# EAGLE board BusPirate-v3.5d-SSOP (EAGLE 5.07)
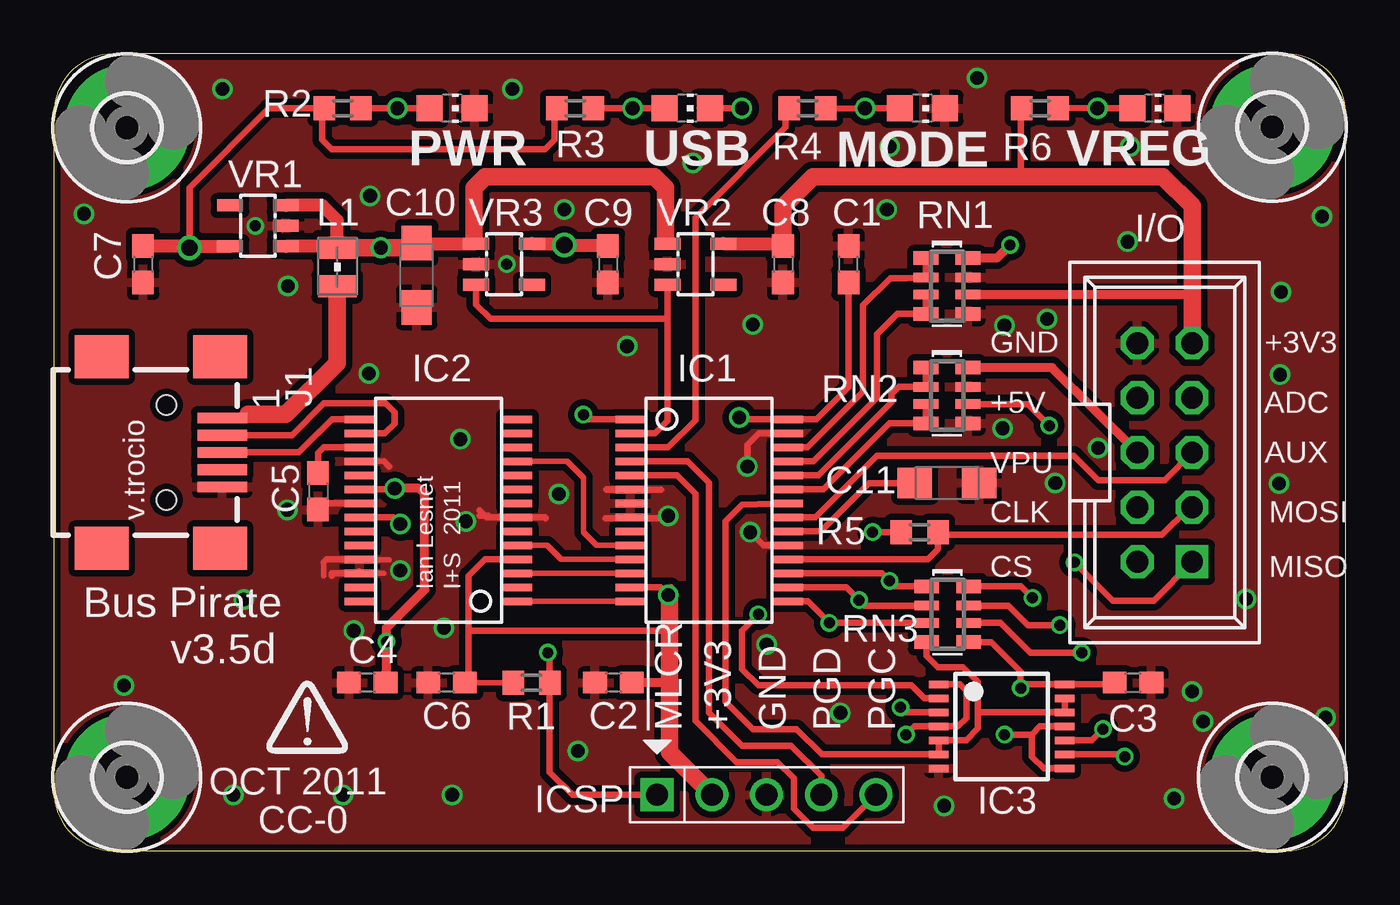
[diagram p0: board, top side]
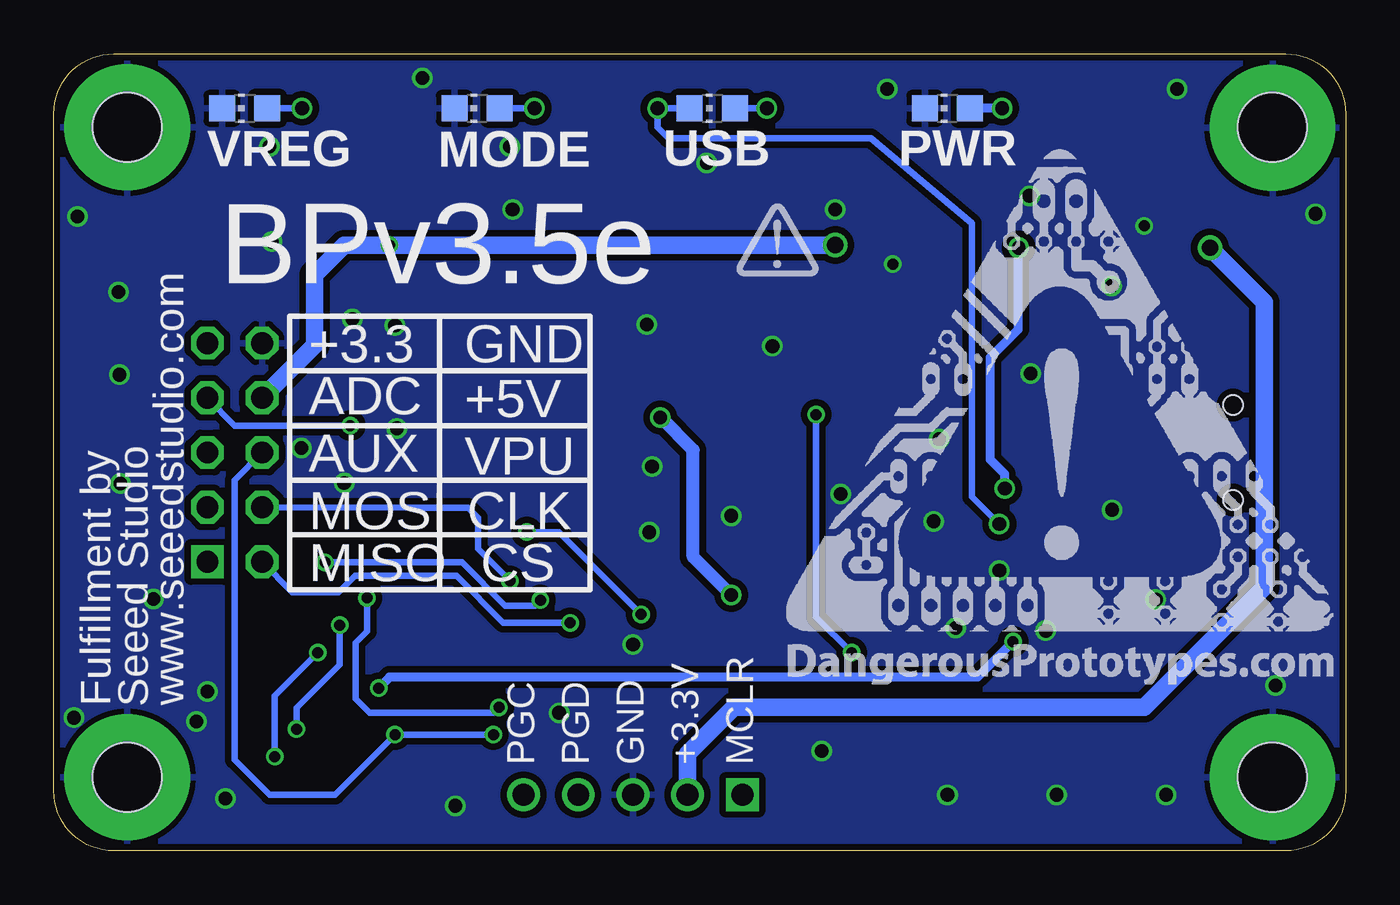
[diagram p1: board, bottom side, seen from below]

Size 60 x 37 mm. Coordinates in mm from the lower left corner, seen from the top.
Copper layers (1*16): Top 0.035mm / dielectric 1.5mm / Bottom 0.035mm
Design rules "Fusion_eagle_rule_v1.1": minimum track width 6mil, minimum drill 12mil, track to track 6mil, track to pad 6mil, pad to pad 6mil, via to via 6mil, smd to smd 0mil, copper to edge 10mil, drill to drill 10mil, minimum pad ring 10mil, minimum via ring 6mil, stop-mask expansion 2mil, vias tented up to drill 100mil, thermal gap 10mil

## Footprints (pad centres in the part's own frame; a part is rotated, then mirrored left to right if it is on the bottom)
C603 = smd 1.1 x 1: 1 -0.85,0; 2 0.85,0
SMC_A = smd 1.6 x 1.4: + -1.5,0; - 1.5,0
3,0-PAD = drill 3 pad 5.842 round: B3,0 0,0
PINSHRD_PTH_2X05B = drill 1.016 square: 1 -5.08,-1.27 | drill 1.016 octagon: 2 -5.08,1.27; 3 -2.54,-1.27; 4 -2.54,1.27; 5 0,-1.27; 6 0,1.27; 7 2.54,-1.27; 8 2.54,1.27; 9 5.08,-1.27; 10 5.08,1.27
SSOP28 = smd 0.348 x 1.397: 1 -4.225,-3.656; 2 -3.575,-3.656; 3 -2.925,-3.656; 4 -2.275,-3.656; 5 -1.625,-3.656; 6 -0.975,-3.656; 7 -0.325,-3.656; 8 0.325,-3.656; 9 0.975,-3.656; 10 1.625,-3.656; 11 2.275,-3.656; 12 2.925,-3.656; 13 3.575,-3.656; 14 4.225,-3.656; 15 4.225,3.656; 16 3.575,3.656; 17 2.925,3.656; 18 2.275,3.656; 19 1.625,3.656; 20 0.975,3.656; 21 0.325,3.656; 22 -0.325,3.656; 23 -0.975,3.656; 24 -1.625,3.656; 25 -2.275,3.656; 26 -2.925,3.656; 27 -3.575,3.656; 28 -4.225,3.656
TSSOP14 = smd 0.35 x 0.9: 1 -1.95,-2.925; 2 -1.3,-2.925; 3 -0.65,-2.925; 4 0,-2.925; 5 0.65,-2.925; 6 1.3,-2.925; 7 1.95,-2.925; 8 1.95,2.925; 9 1.3,2.925; 10 0.65,2.925; 11 0,2.925; 12 -0.65,2.925; 13 -1.3,2.925; 14 -1.95,2.925
HEADER_PRG_1X05_ICSP_B = drill 1.016 square: 1 -5.08,0 | drill 1.016 round: 2 -2.54,0; 3 0,0; 4 2.54,0; 5 5.08,0
CONN_USB_MINI-B@1 = smd 2 x 2.5: BODY@1 -4.45,2.5; BODY@2 4.45,2.5; BODY@3 4.45,-3; BODY@4 -4.45,-3 | smd 0.5 x 2.3: D+ 0,2.6; D- -0.8,2.6; GND 1.6,2.6; ID 0.8,2.6; VUSB -1.6,2.6 | hole 0.9: -2.2,0; 2.2,0
WE-KI_0805_B = smd 1.02 x 1.78: 1 -0.89,0; 2 0.89,0
CHIP-LED0805 = smd 1.2 x 1.2: A 0,-1.05; C 0,1.05
R603 = smd 1 x 1.1: 1 -0.85,0; 2 0.85,0
RN8P-4R-CRA06S = smd 0.63 x 1.15: 1 -1.295,-0.975; 4 1.295,-0.975; 5 1.295,0.975; 8 -1.295,0.975 | smd 0.44 x 1.15: 2 -0.4,-0.975; 3 0.4,-0.975; 6 0.4,0.975; 7 -0.4,0.975
PCB3.7X6 = hole 3.2: 3.81,33.99; 56.99,33.99; 3.81,3.81; 56.99,3.81
SOT-23-5 = smd 0.55 x 1.2: 1 -0.95,-1.3; 2 0,-1.3; 3 0.95,-1.3; 4 0.95,1.3; 5 -0.95,1.3

## Placement (x,y rotation side)
C1  0.1uF  [C603]  36.91,27.24 90 top
C2  0.1uF  [C603]  25.99,7.8 180 top
C3  0.1uF  [C603]  50.12,7.8 0 top
C4  0.1uF  [C603]  14.56,7.8 180 top
C5  0.1uF  [C603]  12.27,16.69 270 top
C6  0.1uF  [C603]  18.24,7.8 180 top
C7  1uF  [C603]  4.15,27.24 270 top
C8  1uF  [C603]  33.86,27.24 270 top
C9  1uF  [C603]  25.74,27.24 270 top
C10  10uF  [SMC_A]  16.85,26.73 270 top
C11  10uF  [SMC_A]  41.48,17.08 0 top
H1  MOUNT-PAD-ROUND3.0  [3,0-PAD]  3.4,3.41 0 top
H2  MOUNT-PAD-ROUND3.0  [3,0-PAD]  3.4,33.57 0 top
H3  MOUNT-PAD-ROUND3.0  [3,0-PAD]  56.59,33.6 0 top
H4  MOUNT-PAD-ROUND3.0  [3,0-PAD]  56.59,3.41 0 top
I/O  HEADER2X5-SHRD-PTH-B  [PINSHRD_PTH_2X05B]  51.6,18.49 90 top
IC1  PIC24FJ64GA002  [SSOP28]  30.44,15.81 270 top
IC2  FT232RL  [SSOP28]  17.86,15.81 90 top
IC3  4066  [TSSOP14]  44.02,5.77 270 top
ICSP  HEADER_PRG_PIC_ICSP  [HEADER_PRG_1X05_ICSP_B]  33.1,2.6 0 top
J1  CONN_USB  [CONN_USB_MINI-B@1]  5.23,18.49 270 top
L1  700mA+ ferrite  [WE-KI_0805_B]  13.16,27.11 270 top
LED1  [CHIP-LED0805]  18.5,34.47 270 top
LED1A  [CHIP-LED0805]  18.5,34.47 90 bottom
LED2  [CHIP-LED0805]  40.34,34.47 270 top
LED2A  [CHIP-LED0805]  40.34,34.47 90 bottom
LED3  [CHIP-LED0805]  51.14,34.47 270 top
LED3A  [CHIP-LED0805]  51.14,34.47 90 bottom
LED4  [CHIP-LED0805]  29.42,34.47 270 top
LED4A  [CHIP-LED0805]  29.42,34.47 90 bottom
R1  2K  [R603]  22.18,7.8 180 top
R2  1K1  [R603]  13.42,34.47 180 top
R3  1K1  [R603]  24.21,34.47 180 top
R4  1K1  [R603]  35.01,34.47 180 top
R5  2K  [R603]  40.21,14.79 180 top
R6  1K1  [R603]  45.8,34.47 180 top
RN1  10k  [RN8P-4R-CRA06S]  41.48,26.22 270 top
RN2  10k  [RN8P-4R-CRA06S]  41.48,21.14 270 top
RN3  10k  [RN8P-4R-CRA06S]  41.51,10.98 270 top
U$1  [DP-LOGO]  9.86,4.5 0 top
U$2  [DP-LOGO-BOTTOM]  24.48,26.67 0 top
U$3  [DP_LOGO_ART_1X1]  25.97,7.74 0 bottom
U$4  [PCB3.7X6]  -0.4,-0.4 0 top
VR1  MCP1801T-3302I/OT  [SOT-23-5]  9.48,29.01 90 top
VR2  MCP1801T-3302I/OT  [SOT-23-5]  29.8,27.24 270 top
VR3  MCP1801T-5002I/OT  [SOT-23-5]  20.91,27.24 270 top

## Library data of the parts
C1-C9 I/O IC1 IC2 ICSP J1 R1-R6 RN1-RN3 U$3 U$4 VR1-VR3 = dp_devices
C10 C11 = rcl
H1-H4 = holes
IC3 = 40xx
L1 = wuerth-elektronik
LED1 LED1A LED2 LED2A LED3 LED3A LED4 LED4A = led
U$1 U$2 = DP-logo

## Nets
$N26: J1.VUSB L1.2
ADC: I/O.7 RN2.6
ADC1: IC1.23 RN2.3 RN2.4
ADC2: IC1.24 RN2.1 RN2.2
ADC3: IC1.25 RN1.3 RN1.4
ADC4: IC1.26 RN1.1 RN1.2
AUX1: I/O.5 IC1.21
CLK: I/O.4 IC1.17 RN3.1
CS: I/O.2 IC1.15 RN3.3
CTS: IC1.10 IC2.11
GND: C1.2 C2.2 C3.2 C4.2 C5.2 C6.2 C7.2 C8.2 C9.2 C10.- C11.- H1.B3,0 H2.B3,0 H3.B3,0 H4.B3,0 I/O.10 IC1.6 IC1.7 IC1.8 IC1.19 IC1.27 IC2.7 IC2.18 IC2.21 IC2.25 IC2.26 IC3.7 ICSP.3 J1.GND LED1.C LED1A.C LED2.C LED2A.C LED3.C LED3A.C RN1.5 RN1.7 RN2.5 RN2.7 VR1.2 VR2.2 VR3.2
LD1: IC1.3 R4.2
MCLR: IC1.1 ICSP.1 R1.1
MISO: I/O.1 IC1.16 RN3.2
MOSI: I/O.3 IC1.18 R5.1
N$1: IC3.2 R5.2
N$2: IC3.9 RN3.6
N$3: C11.+ IC1.20
N$4: IC3.10 RN3.7
N$5: IC3.3 RN3.8
N$6: LED2.A LED2A.A R4.1
N$7: LED1.A LED1A.A R2.1
N$9: C5.1 IC2.17
N$13: LED4.A LED4A.A R3.1
N$15: IC2.15 J1.D+
N$16: IC2.16 J1.D-
N$18: LED3.A LED3A.A R6.1
PGC: IC1.5 ICSP.5
PGD: IC1.4 ICSP.4
PULLUPEN: IC1.22 IC3.5 IC3.6 IC3.12 IC3.13 RN3.4
RTS: IC1.12 IC2.3
RX: IC1.11 IC2.5
RXLED: IC2.22 LED4.C LED4A.C
SWV33: C8.1 I/O.9 R6.2 RN1.6 VR2.5
SWV50: C9.1 I/O.8 RN1.8 VR3.5
TP0: IC1.9
TX: IC1.14 IC2.1
V+: C3.1 C4.1 C10.+ IC2.20 IC3.14 L1.1 RN3.5 VR1.1 VR1.3 VR2.1 VR3.1
VCC: C1.1 C2.1 C6.1 C7.1 IC1.13 IC1.28 IC2.4 ICSP.2 R1.2 R2.2 R3.2 VR1.5
VEXTERN: I/O.6 IC3.1 IC3.4 IC3.8 IC3.11 RN2.8
VREGEN: IC1.2 VR2.3 VR3.3

## Tracks (layer width: path | path; a pad name or v marks a point on that pad's centre or on a via)
$N26
  Top 0.305: 7.25,20.09 J1.VUSB 9.45,20.09 9.62,20.27
  Top 0.813: L1.2 13.16,22.64 10.76,20.27 9.62,20.27 9.04,20.27
ADC  (via drill 0.51)
  Top 0.305: RN2.6 45.23,20.74 v46.23,19.74
  Bottom 0.305: v46.23,19.74 51.6,19.74 I/O.7
ADC1
  Top 0.305: RN2.3 RN2.4 38.81,19.84 35.75,16.78 IC1.23
ADC2
  Top 0.305: RN2.1 RN2.2 39.24,21.54 38.91,21.21 38.91,20.82 35.51,17.43 IC1.24
ADC3
  Top 0.305: RN1.3 RN1.4 39.17,24.92 38.22,23.97 38.22,21.03 35.27,18.08 IC1.25
ADC4
  Top 0.305: RN1.1 RN1.2 39.59,26.59 38.85,26.59 37.58,25.32 37.58,21.31 35.01,18.73 IC1.26
AUX1
  Top 0.305: I/O.5 51.6,17.2 48.52,17.2 47.37,18.35 38.23,18.35 35.37,15.48 IC1.21
CLK  (via drill 0.51)
  Top 0.305: IC1.17 38.47,12.88 v38.82,12.53 39.07,12.27 RN3.1
  Bottom 0.305: I/O.4 43.01,15.93 40.77,15.93 40.3,15.47 40.3,14.01 v38.82,12.53
CS  (via drill 0.51)
  Top 0.305: v36.02,10.58 RN3.3 | v36.02,10.58 36.17,10.58 | v36.02,10.58 35.02,11.58 IC1.15
  Bottom 0.305: I/O.2 48.93,12 46.77,12 46.01,12.76 41.3,12.76 39.13,10.58 v36.02,10.58
CTS
  Top 0.254: IC2.11 23.84,18.08 24.59,17.33 24.59,14.79 25.2,14.18 IC1.10
GND  (via drill 0.51, 0.64)
  Top 0.254: IC2.18 15.33,18.08 | 12.53,13.39 12.53,12.76 | 14.05,13.52 15.58,13.52 | 14.18,12.88 14.18,13.01 | 14.18,12.88 15.32,12.88 | IC2.26 14.18,12.88
  Top 0.305: 20.09,15.48 20.16,15.55 20.02,15.55 | 20.02,15.55 19.77,15.55 | 20.09,15.48 IC2.7 | 20.02,15.55 19.77,15.81 | 20.02,15.55 20.09,15.48 | 15.33,18.08 15.58,17.84 | IC2.21 12.4,16.13 C5.2 | IC2.25 12.67,13.53 12.53,13.39 | IC2.26 12.91,12.88 12.91,12.76 | v32.21,17.84 32.21,18.85 32.74,19.38 IC1.27 33.97,19.39 | IC1.19 32.95,14.18 v32.34,14.79 | 28.2,16.77 25.66,16.77 25.67,16.78 IC1.6 | 25.63,15.45 28.43,15.45 | 21.29,15.48 22.82,15.48 22.84,15.45
  other vias: 23.7,29.78 21.04,27.24 9.35,29.01 8.34,2.6 13.42,2.6 18.5,2.6 24.34,4.63 3.26,7.68 52.03,2.42 59.06,6.18 55.38,11.69 56.9,17.05 56.95,22.1 57,25.94 58.91,29.45 49.87,28.28 38.69,29.78 38.82,32.7 49.99,32.7 29.67,31.93 14.69,30.41 18.88,19.11 19.13,15.3 18.12,10.34 13.93,10.22 8.82,11.67 10.85,15.83 10.88,26.22 14.64,22.16 33.1,9.58 16.08,13.01 53.37,6 52.86,7.4 41.36,2.09 46.51,17.08 48.5,18.7 44.07,19.62 23.45,16.57 28.53,15.55 36.53,6.41 44.15,24.39 32.47,24.44 26.63,23.43 1.4,29.57 7.83,35.36 21.29,35.36 42.88,35.87 46.14,24.7
  pour Top (isolate 0.305): 0.04,37.02 59.96,37.05 60.07,-0.23 0.02,-0.18
  pour Bottom (isolate 0.305): -0.01,37.05 59.99,37.1 60.04,-0.13 -0.01,-0.23
LD1
  Top 0.305: 34.25,34.35 R4.2 33.99,34.31 33.99,33.59 29.8,29.39 29.8,20 28.53,18.73 IC1.3
  Top 0.406: R4.2 33.86,34.15
MCLR  (via drill 0.51)
  Top 0.305: ICSP.1 24.09,2.6 23.03,3.65 R1.1 23.03,9.11 v22.94,9.2 | IC1.1 24.81,20.03 v24.59,20.25
  Bottom 0.305: v24.59,20.25 24.59,10.85 v22.94,9.2
MISO  (via drill 0.51)
  Top 0.305: I/O.1 51.09,11.61 49.18,11.61 v47.41,13.39 | IC1.16 36.8,12.23 v37.4,11.63 | v37.4,11.63 37.29,11.74 | v37.4,11.63 37.66,11.38 RN3.2
  Bottom 0.305: v47.41,13.39 41.05,13.39 39.04,11.38 37.66,11.38 v37.4,11.63
MOSI
  Top 0.305: I/O.3 52.74,15.93 51.47,14.66 41.19,14.66 R5.1 41.06,13.99 40.61,13.53 IC1.18
N$1  (via drill 0.51)
  Top 0.305: v38.03,14.79 R5.2 | IC3.2 40.44,7.07 39.83,7.68 32.72,7.68 31.96,8.44 31.96,10.22 v32.72,10.98
  Bottom 0.305: v38.03,14.79 36.53,14.79 v32.72,10.98
N$2  (via drill 0.51)
  Top 0.305: IC3.9 49.64,4.47 v49.74,4.38 | RN3.6 43.97,10.58 45.35,9.2 v47.74,9.2
  Bottom 0.305: v47.74,9.2 49.74,7.2 v49.74,4.38
N$3
  Top 0.305: IC1.20 35.63,14.83 37.86,17.07 39.97,17.07 C11.+
N$4  (via drill 0.51)
  Top 0.305: IC3.10 48.2,5.12 v48.72,5.65 | v46.72,10.47 45.25,10.47 44.34,11.38 RN3.7
  Bottom 0.305: v46.72,10.47 46.72,8.64 48.72,6.64 v48.72,5.65
N$5  (via drill 0.51)
  Top 0.305: IC3.3 39.56,6.42 v39.33,6.66 | RN3.8 44.92,12.27 v45.45,11.74
  Bottom 0.305: v39.33,6.66 39.58,6.41 45.34,6.41 45.99,7.06 45.99,9.65 45.46,10.18 v45.46,11.74 v45.45,11.74
N$6  (via drill 0.64)
  Top 0.305: 36.12,34.45 LED2A.A v37.67,34.47
  Top 0.406: R4.1 36.12,34.45
  Bottom 0.305: v37.67,34.47 LED2A.A
N$7  (via drill 0.64)
  Top 0.305: LED1A.A v15.96,34.47 R2.1
  Top 0.406: R2.1 14.18,34.47
  Bottom 0.406: v15.96,34.47 LED1A.A
N$9
  Top 0.305: IC2.17 12.53,18.73 12.27,18.47 C5.1
N$13  (via drill 0.64)
  Top 0.305: R3.1 v26.88,34.47 LED4A.A
  Bottom 0.305: v26.88,34.47 LED4A.A
N$15
  Top 0.305: IC2.15 12.92,20.03 12.29,19.4 11.38,18.49 J1.D+
N$16
  Top 0.254: IC2.16 14.23,19.36
  Top 0.305: IC2.16 15.36,19.38 15.82,19.83 15.82,20.37 15.41,20.77 12.54,20.77 11.06,19.29 J1.D-
N$18  (via drill 0.64)
  Top 0.305: R6.1 50.06,34.5 | LED3A.A v48.47,34.47
  Top 0.406: 50.06,34.5 LED3A.A
  Bottom 0.305: v48.47,34.47 LED3A.A
PGC
  Top 0.305: ICSP.5 36.66,1.07 35.26,1.07 34.37,1.96 34.37,3.36 33.61,4.12 31.71,4.12 29.8,6.03 29.8,16.57 28.94,17.43 IC1.5
PGD
  Top 0.305: ICSP.4 35.64,3.49 34.25,4.88 31.96,4.88 30.44,6.41 30.44,17.08 29.43,18.08 IC1.4
PULLUPEN
  Top 0.305: 42.92,6.41 42.92,5.69 42.37,5.14 41.11,5.14 IC3.5 IC3.6 35.67,4.47 34.5,5.65 32.47,5.65 31.2,6.92 31.2,15.3 31.96,16.06 IC1.22 | 42.92,6.41 42.94,6.42 IC3.12 IC3.13 | 42.92,6.41 42.92,7.84 42.23,8.53 41.06,8.53 40.53,9.06 RN3.4
RTS
  Top 0.254: IC2.3 IC1.12
RX
  Top 0.254: IC2.5 22.92,14.18 23.57,13.53 IC1.11
RXLED  (via drill 0.64)
  Top 0.305: v31.96,34.47 LED4A.C | IC2.22 15.76,15.48 v16.08,15.17
  Top 0.406: LED4A.C 30.05,34.47
  Bottom 0.305: LED4A.C v31.96,34.47 31.96,33.59 31.45,33.08 22.05,33.08 17.35,29.14 17.35,16.44 v16.08,15.17
SWV33
  Top 0.305: R6.2 44.91,34.35 44.91,31.36 44.85,31.36 44.91,31.3
  Top 0.406: R6.2 44.98,34.47 | RN1.6 52.72,25.82 52.87,25.97
  Top 0.61: VR2.5 33.86,28.19 C8.1
  Top 0.813: C8.1 33.86,29.9 35.26,31.3 44.91,31.3 51.5,31.3 52.87,29.94 52.87,25.97 I/O.9
SWV50  (via drill 0.51, 0.76)
  Top 0.406: RN1.8 43.8,27.51 v44.41,28.12
  Top 0.61: VR3.5 23.64,28.19 | v23.7,28.12 25.7,28.12 C9.1
  Top 0.813: 23.64,28.19 v23.7,28.12
  Bottom 0.813: v23.7,28.12 v44.41,28.12 46.52,28.12 47.9,26.74 47.9,23.46 I/O.8
TX
  Top 0.254: IC2.1 IC1.14
V+  (via drill 0.51, 0.64)
  Top 0.305: IC2.20 15.79,16.78 v15.83,16.82 | C3.1 49.19,7.72 IC3.14 45,7.72 v44.91,7.55 | VR2.1 | 28.5,28.41 VR2.1 | RN3.5 43.55,9.67 44.9,8.33 44.9,7.56
  Top 0.406: v15.45,9.71 15.45,8.5 C4.1 15.45,7.84 v15.45,9.71 | v15.45,9.71 15.45,10.34 17.23,12.12 17.23,16.57 16.97,16.82 v15.83,16.82 | RN3.5 | v44.91,7.55 44.9,7.56
  Top 0.508: 28.4,28.51 28.5,28.41
  Top 0.61: L1.1 13.16,29.27 12.47,29.96 VR1.3 | L1.1 13.1,28.06 | VR1.1 13.16,28.06 L1.1 | C10.+ 16.89,28.19 VR3.1 19.51,28.28 19.51,28.51
  Top 0.813: L1.1 v15.19,28 v15.2,28 16.47,28 16.72,28.25 16.87,28.25 C10.+ | 19.51,28.51 19.51,30.79 20.02,31.3 27.9,31.3 28.4,30.79 28.4,28.51
  Bottom 0.406: v15.45,9.71 17.1,8.06 44.41,8.06 v44.91,7.55 | v15.83,16.82 15.83,17.49 16.5,18.16 16.5,22.91 15.21,24.2 v15.21,27.99 v15.2,28
VCC  (via drill 0.64, 0.76)
  Top 0.254: C6.1 R1.2
  Top 0.305: 28.68,12.23 v28.53,11.87 28.17,12.23 IC1.13 | v6.31,28 6.31,30.79 9.99,34.47 R2.2 12.4,34.35 12.47,34.28 12.47,33.01 12.91,32.57 22.82,32.57 23.26,33.02 23.26,34.54 23.32,34.6 R3.2 | v31.83,20.12 31.93,20.03 IC1.28 35.42,20.03 36.91,21.52 C1.1 | 28.6,10.22 19.26,10.22 | 19.26,10.22 19.26,7.97 C6.1 | IC2.4 20.03,13.53 19.26,12.76 19.26,10.22
  Top 0.406: C2.1 28.47,7.8 28.6,7.68
  Top 0.508: v6.31,28 6.37,28.06
  Top 0.61: 28.6,11.8 v28.53,11.87 | VR1.5 6.31,28.06 v6.31,28 | 6.24,28.06 4.15,28.06 C7.1
  Top 0.813: v6.31,28 6.24,28.06 | 30.63,2.66 ICSP.2 28.6,4.56 28.6,7.68 28.6,10.22 28.6,11.8
  Bottom 0.61: v28.53,11.87 30.31,13.65 30.31,18.6 v31.83,20.12
  Bottom 0.813: ICSP.2 30.56,4.5 28.4,6.66 9.35,6.66 3.78,12.24 3.78,25.47 v6.31,28
VEXTERN  (via drill 0.51)
  Top 0.305: IC3.8 45.97,3.82 45.42,4.38 45.42,5.39 | IC3.11 45.8,5.77 45.42,5.39 | IC3.1 42.07,7.72 42.37,7.42 42.37,6.15 41.99,5.77 IC3.4 39.96,5.77 v39.58,5.39 | v44.15,5.39 45.42,5.39
  Top 0.406: RN2.8 46.37,22.43 I/O.6
  Bottom 0.305: v39.58,5.39 v44.15,5.39 46.95,2.6 49.98,2.6 51.6,4.21 51.6,17.2 I/O.6
VREGEN
  Top 0.305: 19.61,25.36 20.28,24.7 28.5,24.7 | 28.5,24.7 28.5,19.97 27.91,19.38 IC1.2 | VR2.3 | 28.5,24.7 VR2.3 | 19.61,25.36 VR3.3 | 19.61,25.36

## Text on the board
tPlace: GND | +3V3 | +5V | ADC | VPU | AUX | CLK | MOSI | CS | MISO | !MLCR | +3V3 | GND | PGD | PGC
tNames: PWR | USB | MODE | VREG | v.trocio | 2011 | Ian Lesnet | I+S | Bus Pirate | v3.5d | OCT 2011 | CC-0
bNames: PWR | USB | MODE | VREG | BPv3.5e | GND | +3.3 | ADC | +5V | VPU | AUX | CLK | MOSI | CS | MISO | www.seeedstudio.com | Seeed Studio | Fulfillment by | MCLR | +3.3V | GND | PGD | PGC
Reference: GND | +3v | +5v | ADC | Vpu | AUX | USB | CLK | MOSI | CS | MISO | I/O header | MCLR | +3.3V | GND | DATA | CLOCK | Bus Pirate v3.5d | Ian Lesnet | CC-0 | SEP 2011 | Programming Header | http://dangerousprototypes.com